# EAGLE board PDM_2019_RevA (EAGLE 9.1.3)
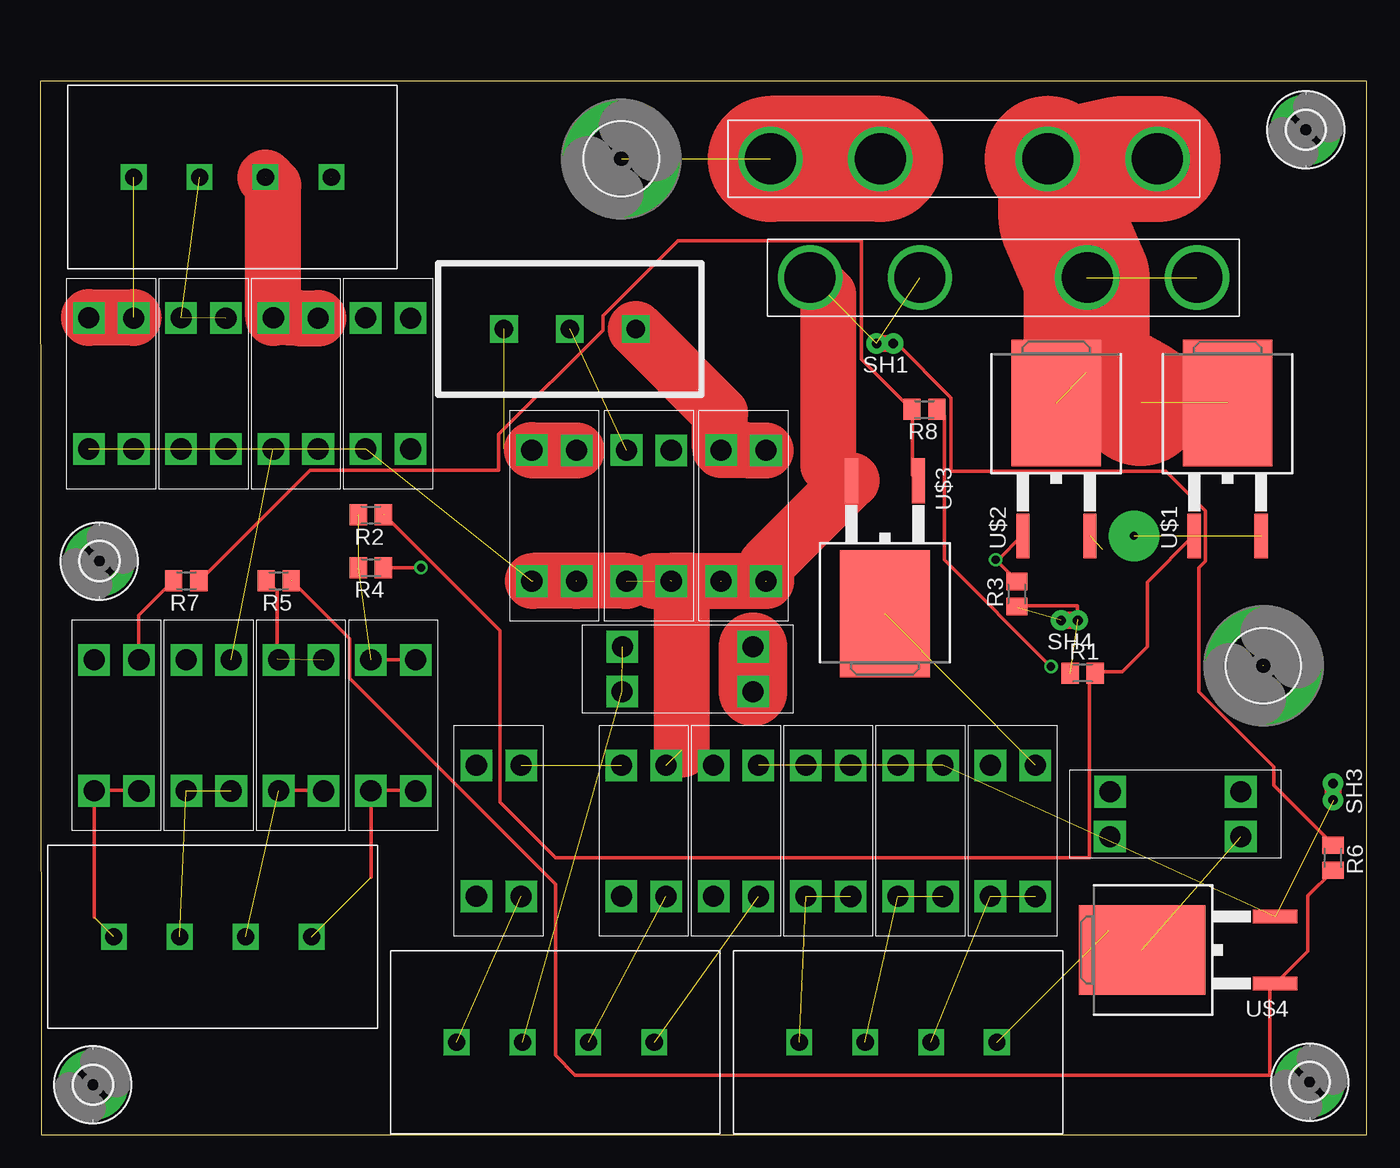
[diagram p0: board, top side]
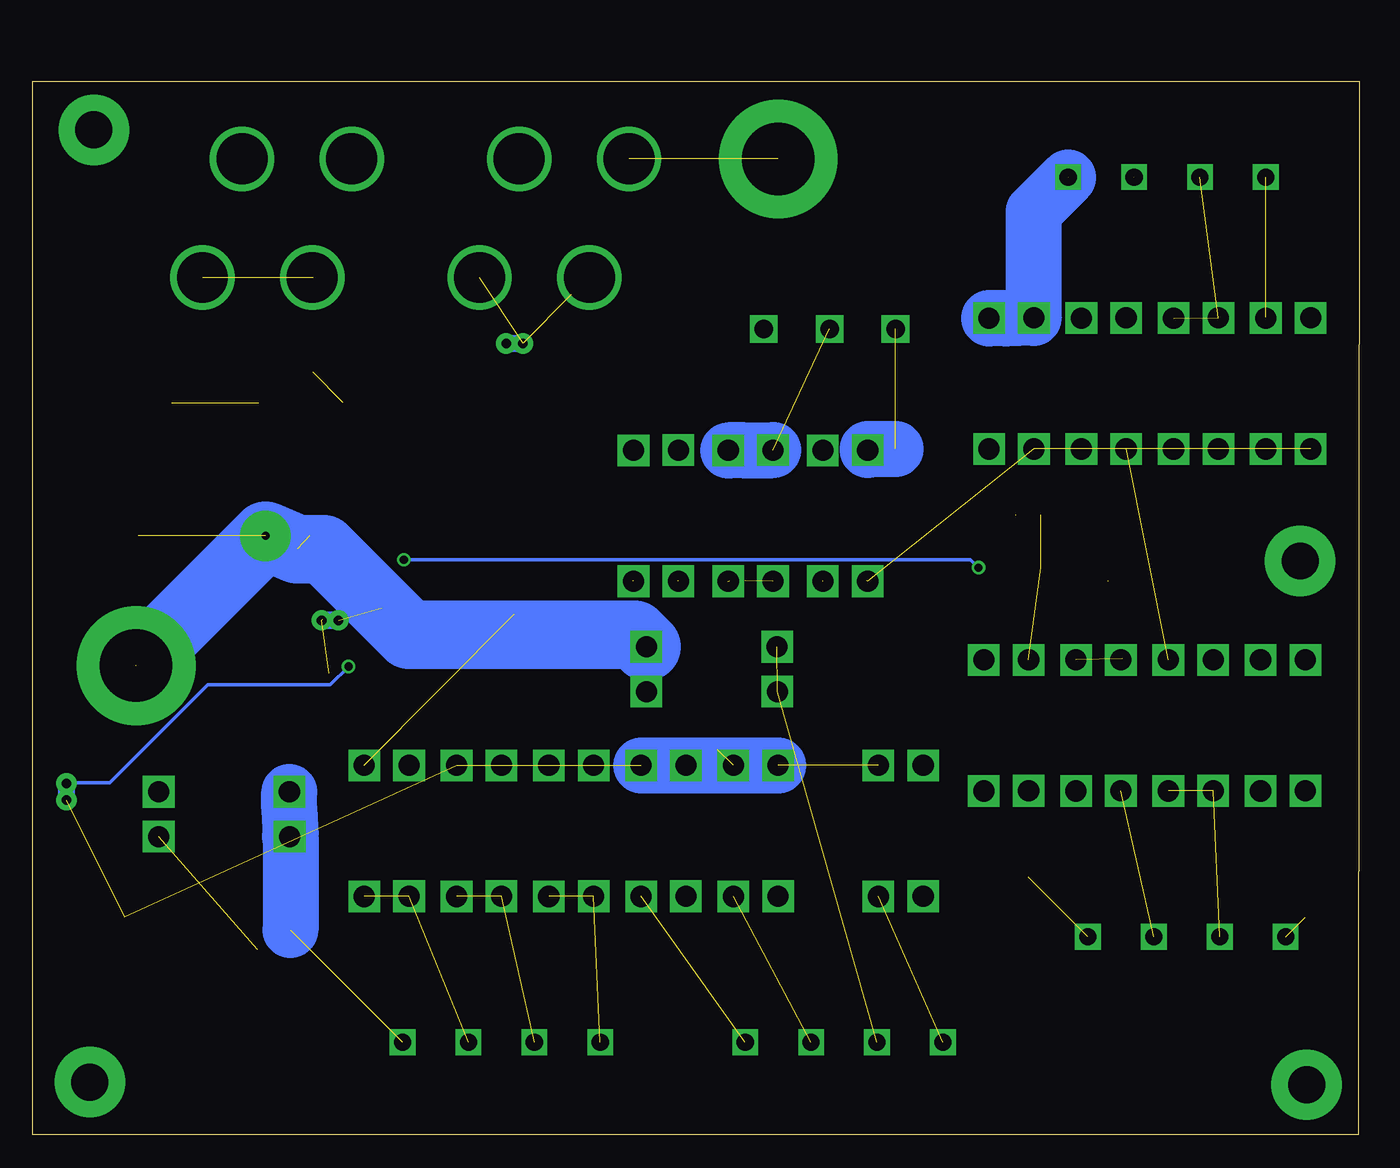
[diagram p1: board, bottom side, seen from below]

Size 100.64 x 79.9 mm. Coordinates in mm from the lower left corner, seen from the top.
Outline: 0.1,0 100.64,0 100.64,79.9 0,79.9 0.1,0
Copper layers (1*16): Top 0.035mm / dielectric 1.5mm / Bottom 0.035mm
Design rules "default": minimum track width 10mil, minimum drill 24mil, track to track 8mil, track to pad 8mil, pad to pad 8mil, via to via 8mil, smd to smd 8mil, copper to edge 40mil, drill to drill 8mil, minimum pad ring 10mil, minimum via ring 8mil, stop-mask expansion 4mil, vias tented up to drill 0mil, thermal gap 10mil
Net classes: 0 LO RAIL: width 4.24 mm, drill 0.5 mm, clearance 0.2 mm; 1 HIGH RAIL: width 9.55 mm, drill 0.5 mm, clearance 0.2 mm; 2 SIG: width 0.13 mm, drill 0.5 mm, clearance 0.2 mm; 3 30Rail: width 5.2 mm, drill 0.5 mm, clearance 0.2 mm

## Footprints (pad centres in the part's own frame; a part is rotated, then mirrored left to right if it is on the bottom)
3555-2 = drill 3.86: L1 -14.68,0; L2 -6.35,0; R1 6.35,0; R2 14.68,0
3568 = drill 1.6 square: L1 0,3.4; L2 0,0; R1 9.94,3.4; R2 9.92,0
281-1423 = drill 1.3 square: P$1 -2.5,0; P$2 -7.5,0; P$3 2.5,0; P$4 7.5,0
2,8-PAD = drill 2.8 pad 5.334: B2,8 0,0
535512-04 = drill 1.4 square: LEFT -5,0; MIDDLE 0,0; RIGHT 5,0
5,5-PAD = drill 5.5 pad 9: B5,5 0,0
M0805 = smd 1.3 x 1.6: 1 -0.95,0; 2 0.95,0
SHORT_ALL-50 = drill 0.737 pad 1.524: 1 -0.635,0; 2 0.635,0
TO263 = smd 1 x 3.4: 1 -2.54,-6.6; 2 2.54,-6.6 | smd 6.8 x 9.6: 3 0,3.5

## Placement (x,y rotation side)
ABSPUMP  FH3555-2  [3555-2]  70.1,74 180 top
ABSSENS  3568FUSEHOLDER  [3568]  14.1,52 90 top
ABSVALVE  3568FUSEHOLDER  [3568]  55.07,41.97 90 top
ARB  3568FUSEHOLDER  [3568]  44.1,28 270 top
BRAKE  3568FUSEHOLDER  [3568]  54.1,37 180 top
COILS  3568FUSEHOLDER  [3568]  65.1,28 270 top
DAQ  3568FUSEHOLDER  [3568]  21.1,52 90 top
DRS  3568FUSEHOLDER  [3568]  51.1,28 270 top
ECU  3568FUSEHOLDER  [3568]  11.1,36 270 top
ECUPWR  LM5-4  [281-1423]  13.1,15 0 top
FANCTRL  3568FUSEHOLDER  [3568]  4.1,36 270 top
FANPWR  3568FUSEHOLDER  [3568]  72.1,28 270 top
FUELPUMPCTRL  3568FUSEHOLDER  [3568]  18.1,36 270 top
FUELPUMPPWR  3568FUSEHOLDER  [3568]  91.1,26 180 top
H1  MOUNT-PAD-ROUND2.8  [2,8-PAD]  4.5,43.5 0 top
H2  MOUNT-PAD-ROUND2.8  [2,8-PAD]  4.01,3.78 0 top
H3  MOUNT-PAD-ROUND2.8  [2,8-PAD]  96.32,3.98 0 top
H4  MOUNT-PAD-ROUND2.8  [2,8-PAD]  96.02,76.2 0 top
INJECTORS  3568FUSEHOLDER  [3568]  58.1,28 270 top
J2  J-04-  [535512-04]  40.2,61.1 180 top
KILL  3568FUSEHOLDER  [3568]  25.1,36 270 top
MAIN  FH3555-2  [3555-2]  73.1,65 180 top
MCU  3568FUSEHOLDER  [3568]  28.1,52 90 top
NORTHLO  LM5-4  [281-1423]  14.6,72.62 0 top
POWER  MOUNT-PAD-ROUND5.5  [5,5-PAD]  92.81,35.56 0 top
POWER1  MOUNT-PAD-ROUND5.5  [5,5-PAD]  44.1,74 0 top
R1  10k  [M0805]  79.1,35 0 top
R2  24k  [M0805]  25.1,47 180 top
R3  10k  [M0805]  74.1,41 90 top
R4  24k  [M0805]  25.1,43 180 top
R5  24k  [M0805]  18.1,42 180 top
R6  10k  [M0805]  98.1,21 270 top
R7  24k  [M0805]  11.1,42 180 top
R8  10k  [M0805]  67.1,55 180 top
SH1  SHORTA5  [SHORT_ALL-50]  64.1,60 0 top
SH3  SHORTA5  [SHORT_ALL-50]  98.1,26 90 top
SH4  SHORTA5  [SHORT_ALL-50]  78.1,39 0 top
SHIFTER  3568FUSEHOLDER  [3568]  33.1,28 270 top
SOUTHHI  LM5-4  [281-1423]  65.1,7 180 top
SOUTHLO  LM5-4  [281-1423]  39.1,7 0 top
SPAREF  3568FUSEHOLDER  [3568]  47.89,41.97 90 top
SPAREF2  3568FUSEHOLDER  [3568]  40.71,41.97 90 top
TRANSPONDER  3568FUSEHOLDER  [3568]  7.1,52 90 top
U$1  MTB50P03HDLT4G  [TO263]  90.1,52 0 top
U$2  MTB50P03HDLT4G  [TO263]  77.1,52 0 top
U$3  MTB50P03HDLT4G  [TO263]  64.1,43 180 top
U$4  MTB50P03HDLT4G  [TO263]  87.1,14 90 top

## Library data of the parts
ABSPUMP ABSSENS ABSVALVE ARB BRAKE COILS DAQ DRS ECU FANCTRL FANPWR FUELPUMPCTRL FUELPUMPPWR INJECTORS KILL MAIN MCU SHIFTER SPAREF SPAREF2 TRANSPONDER = fuse
ECUPWR NORTHLO SOUTHHI SOUTHLO = con-weidmueller-sl35
H1-H4 POWER POWER1 = holes
J2 = 3pincon
R1-R8 = adafruit
SH1 SH3 SH4 = shorts; BOM: no
U$1-U$4 = transistor-fet

## Nets
+12V [30Rail]: BRAKE.L1 BRAKE.L2 POWER.B5,5 SH4.1 U$1.2 U$2.2
MAINRAIL: ABSSENS.L1 ABSVALVE.L1 ABSVALVE.L2 ARB.L1 ARB.L2 COILS.L1 DAQ.L1 DRS.L1 DRS.L2 ECU.L1 INJECTORS.L1 MAIN.R1 MCU.L1 SH1.1 SH3.1 SHIFTER.L1 SPAREF2.L1 SPAREF2.L2 SPAREF.L1 SPAREF.L2 TRANSPONDER.L1 U$3.2 U$4.2
N$1: COILS.R1 COILS.R2 SOUTHHI.P$3
N$2 [HIGH RAIL]: ABSPUMP.L1 ABSPUMP.L2 MAIN.L1 U$1.3 U$2.3
N$3 [SIG]: R3.2 R4.1 U$2.1
N$4: FUELPUMPPWR.R1 FUELPUMPPWR.R2 SOUTHHI.P$2
N$5: KILL.L1 KILL.L2 R2.2 R4.2
N$6: FANPWR.L1 U$3.3
N$7: J2.MIDDLE SPAREF.R1 SPAREF.R2
N$8 [HIGH RAIL]: ABSPUMP.R1 ABSPUMP.R2 POWER1.B5,5
N$9: FANPWR.R1 FANPWR.R2 SOUTHHI.P$1
N$10 [SIG]: ECUPWR.P$2 FANCTRL.R1 FANCTRL.R2
N$11: ABSVALVE.R1 ABSVALVE.R2 J2.LEFT
N$12: ECU.R1 ECU.R2 ECUPWR.P$1
N$13 [SIG]: FANCTRL.L1 R7.2
N$14: SHIFTER.R1 SOUTHLO.P$2
N$15: BRAKE.R1 BRAKE.R2 SOUTHLO.P$1
N$16 [SIG]: ECUPWR.P$3 FUELPUMPCTRL.R1 FUELPUMPCTRL.R2
N$17: NORTHLO.P$2 TRANSPONDER.R1 TRANSPONDER.R2
N$18: DAQ.R1 DAQ.R2 NORTHLO.P$3
N$19: MCU.R1 MCU.R2 NORTHLO.P$4
N$20 [SIG]: R1.1 R3.1 SH4.2
N$21 [SIG]: ECUPWR.P$4 KILL.R1 KILL.R2
N$22: ARB.R1 SOUTHLO.P$3
N$23: DRS.R1 SOUTHLO.P$4
N$24 [SIG]: R1.2 R2.1 U$1.1
N$25 [SIG]: R5.1 R6.2 U$4.1
N$26: INJECTORS.R1 INJECTORS.R2 SOUTHHI.P$4
N$27: J2.RIGHT SPAREF2.R1 SPAREF2.R2
N$28: FUELPUMPPWR.L1 U$4.3
N$30 [SIG]: R7.1 R8.2 U$3.1
N$31 [SIG]: FUELPUMPCTRL.L1 R5.2
N$33 [SIG]: R8.1 SH3.2
N$35 [SIG]: R6.1 SH1.2
N$37: ABSSENS.R1 ABSSENS.R2 NORTHLO.P$1

## Tracks (layer width: path | path; a pad name or v marks a point on that pad's centre or on a via)
+12V  (via drill 0.61 pad 3.81)  (4 unrouted)
  Top 5.2: BRAKE.L2 BRAKE.L1
  Bottom 5.2: 92.8,35.6 v83,45.4 80.6,44.4 78.6,44.4 74.15,39.95 72.1,37.9 55,37.9 BRAKE.L2
MAINRAIL  (19 unrouted)
  Top 4.24: 46.6,42 47.8,42 48.7,42 | 61.25,49.35 55.1,43.2 55.1,42 51.7,42 49.6,42 48.7,42 | 61.25,49.35 61.5,49.6 U$3.2 | 58.5,65 59.8,63.7 59.8,50.8 61.25,49.35 | 48.7,29.2 48.7,42 | 37.4,42 40.7,42 44.4,42 SPAREF.L1
  Bottom 4.24: ARB.L2 ARB.L1 DRS.L2 DRS.L1
N$1  (2 unrouted)
N$2  (3 unrouted)
  Top 9.55: 83.5,55.5 79.4,57.8 79.4,65 77.5,69.4 77.5,73 | 77.5,73 76.5,74 ABSPUMP.L2 | ABSPUMP.L1 82.1,74 77.5,73
N$3  (via drill 0.61)
  Top 0.254: v28.9,43 R4.1 | R3.2 74.1,42 v72.5,43.6 72.7,43.5 72.7,43.6 74.5,45.4 U$2.1
  Bottom 0.254: v28.9,43 29.5,43.6 v72.5,43.6
N$4  (1 unrouted)
  Bottom 4.24: 81.1,22.6 81.1,15.5 | 81.1,22.6 FUELPUMPPWR.R1 | FUELPUMPPWR.R2 81.2,26 81.2,24.7 81.1,22.6
N$5  (2 unrouted)
  Top 0.254: KILL.L2 KILL.L1
N$6  (1 unrouted)
N$7  (1 unrouted)
  Bottom 4.24: SPAREF.R2 47.8,51.9 46.6,51.9 SPAREF.R1
N$8  (1 unrouted)
  Top 9.55: ABSPUMP.R1 ABSPUMP.R2
N$9  (2 unrouted)
N$10  (1 unrouted)
  Top 0.254: 4.1,16.5 FANCTRL.R2 4.2,26.1 7.5,26.1 FANCTRL.R1
N$11
  Top 4.24: J2.LEFT 51.6,54.7 51.6,52 ABSVALVE.R1 53.8,51.9 55,51.9 ABSVALVE.R2
N$12  (2 unrouted)
N$13
  Top 0.254: FANCTRL.L1 7.5,39.4 10.1,42 R7.2
N$14  (1 unrouted)
N$15  (2 unrouted)
N$16  (1 unrouted)
  Top 0.254: FUELPUMPCTRL.R1 21.5,26.1 18.2,26.1 FUELPUMPCTRL.R2
N$17  (1 unrouted)
  Top 4.24: TRANSPONDER.R2 7.1,62 3.7,62 TRANSPONDER.R1
N$18  (1 unrouted)
  Top 4.24: 17.1,72.6 17.7,72 17.7,62 | 17.7,62 DAQ.R1 | DAQ.R2 21.1,61.9 19.8,61.9 17.7,62
N$19  (1 unrouted)
  Bottom 4.24: 22.1,72.6 24.7,70 24.7,62 | 24.7,62 MCU.R1 | MCU.R2 28.1,61.9 26.8,61.9 24.7,62
N$20  (2 unrouted)
  Top 0.254: 78.7,39.1 78.7,40.1 74.1,40.1 R3.1
N$21  (1 unrouted)
  Top 0.254: 25.1,19.5 KILL.R2 25.2,26.1 28.5,26.1 KILL.R1
N$22  (1 unrouted)
N$23  (1 unrouted)
N$24  (1 unrouted)
  Top 0.254: 26.1,47 34.9,38.2 34.9,25.2 39.1,21 79.6,21 79.6,34.6 80,35 R1.2 80.1,35.1 82.1,35.1 84,37 84,41.9 87.5,45.4 U$1.1
N$25  (1 unrouted)
  Top 0.254: 19.1,42 23.5,37.6 23.5,34.6 39.1,19 39.1,6 40.6,4.5 93.3,4.5 93.3,11 93.7,11.4 U$4.1 93.8,11.5 96.2,13.9 96.2,18.1 98.1,20 R6.2
N$26  (2 unrouted)
N$27  (1 unrouted)
  Top 4.24: SPAREF2.R2 37.4,51.9 SPAREF2.R1
  Bottom 4.24: 35.2,52 37.3,52 SPAREF2.R1
N$28  (1 unrouted)
N$30
  Top 0.254: R7.1 12.1,42 20.5,50.4 34.8,50.4 34.8,53.1 42.7,61 42.7,62.1 48.4,67.8 62.3,67.8 62.3,58.8 66.1,55 R8.2 66.2,54.9 66.2,50 66.6,49.6 U$3.1
N$31  (1 unrouted)
  Top 0.254: 18,36.1 18,41.2 17.2,42 R5.2
N$33  (via drill 0.61)
  Top 0.254: v76.7,35.5 68.6,43.6 68.6,54.5 68.1,55 R8.1
  Bottom 0.254: v76.7,35.5 78.1,34.1 87.4,34.1 94.8,26.7 98.1,26.7 SH3.2
N$35
  Top 0.254: SH1.2 65,60 69.1,55.9 69.1,50.3 85.4,50.3 88.4,47.3 88.4,43.5 87.9,43 87.9,33.6 93.6,27.9 93.6,26.5 98.1,22 R6.1
N$37  (2 unrouted)